# Altium PCB DS134-1.0-A色度传感器partA.PcbDoc
Units mil, origin at the board's own origin, x right, y up, seen from the top; angles counter-clockwise.
Board outline 1653.54 x 3661.42 mil, 2 copper layers (Top Layer, Bottom Layer), stack 62.249 mil thick; 32 components, 39 nets, 160 pads, 79 vias.
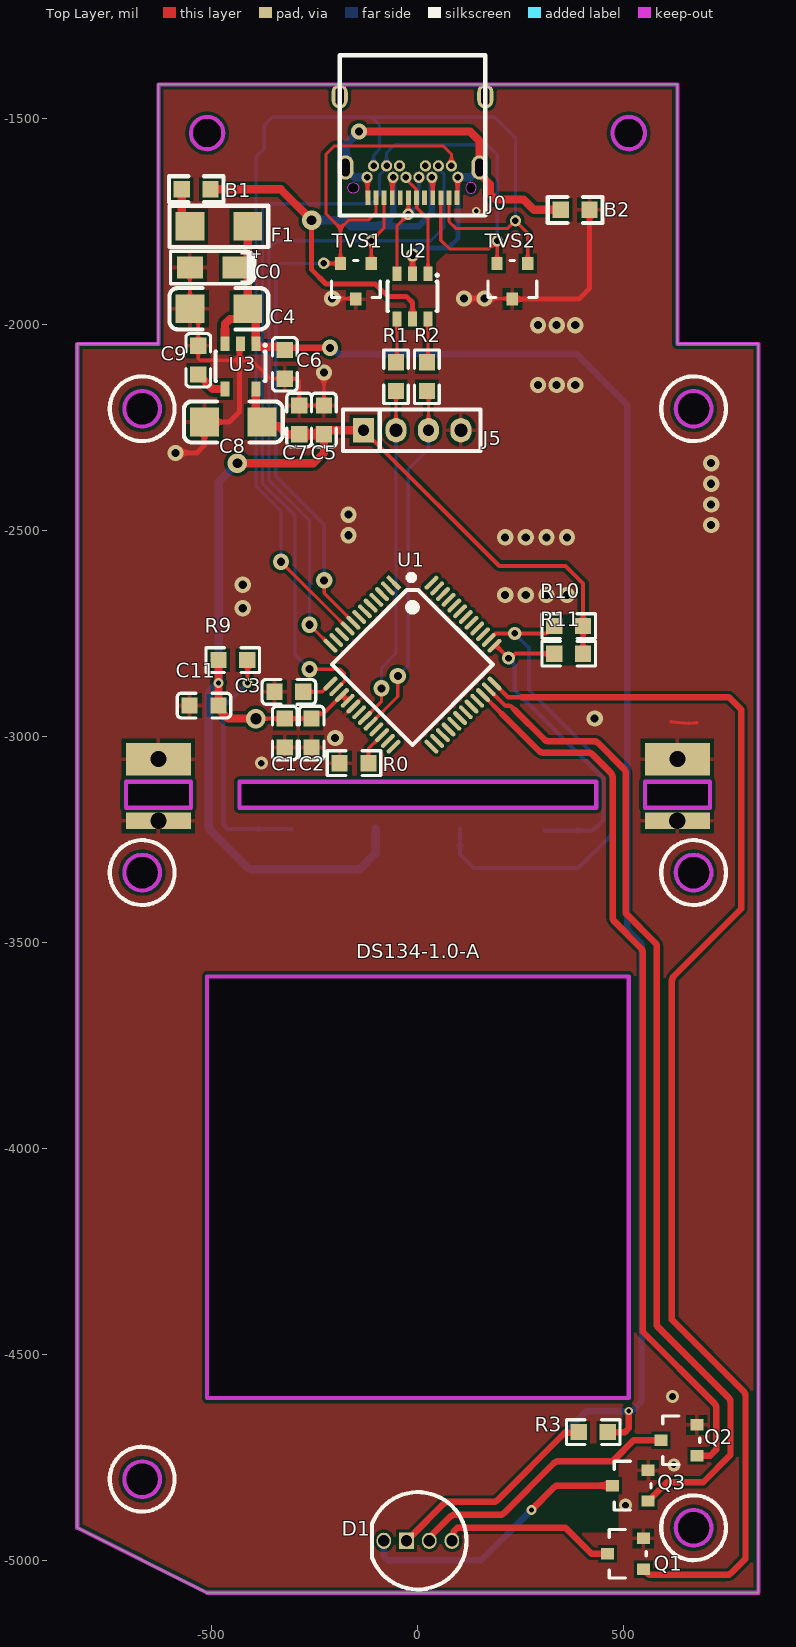
[diagram p0: Top Layer view]
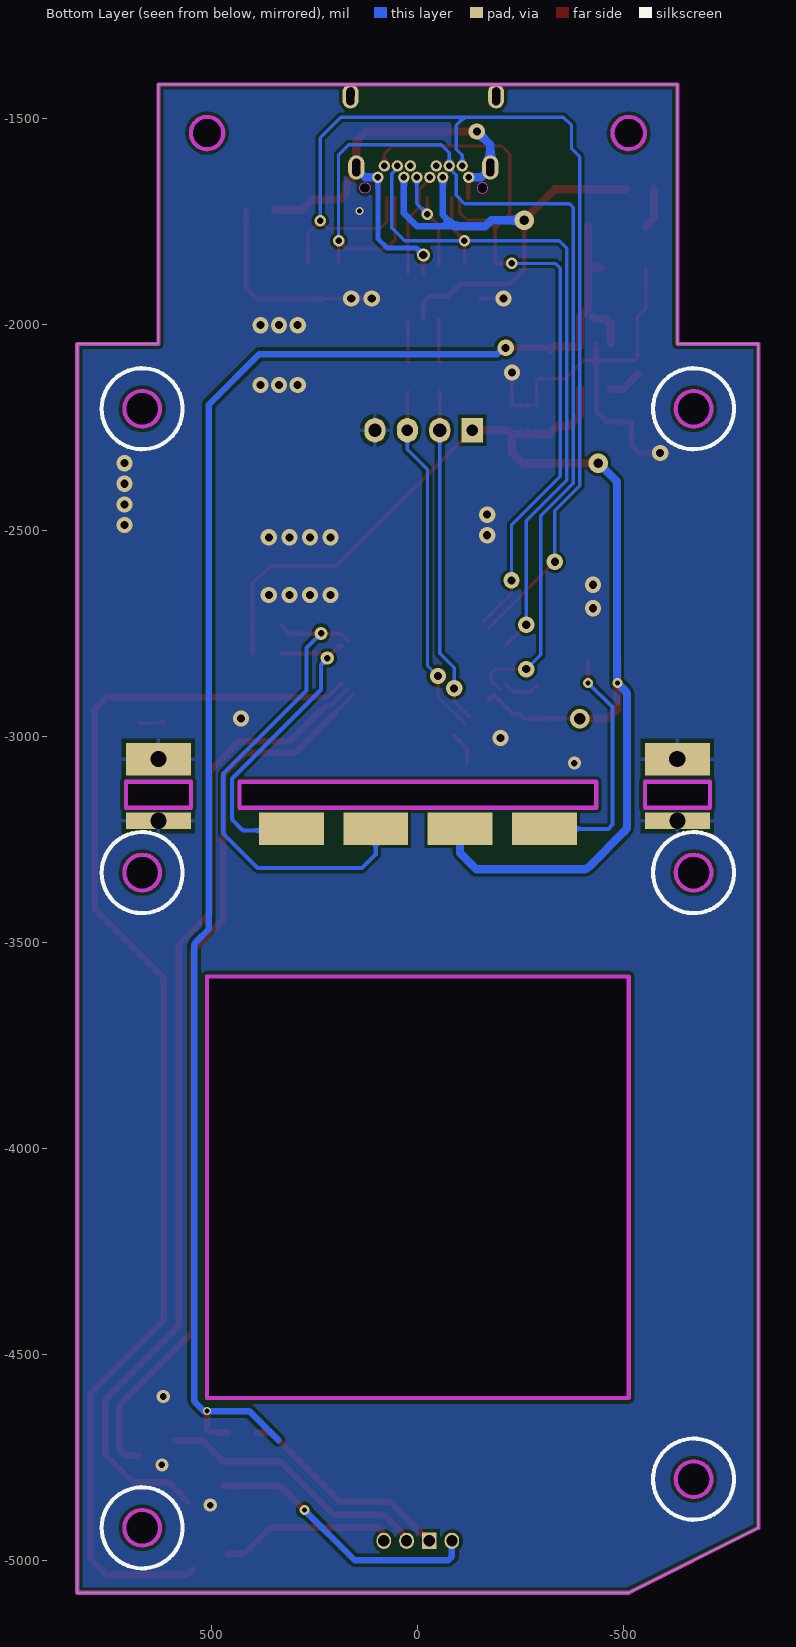
[diagram p1: Bottom Layer view, seen from below]
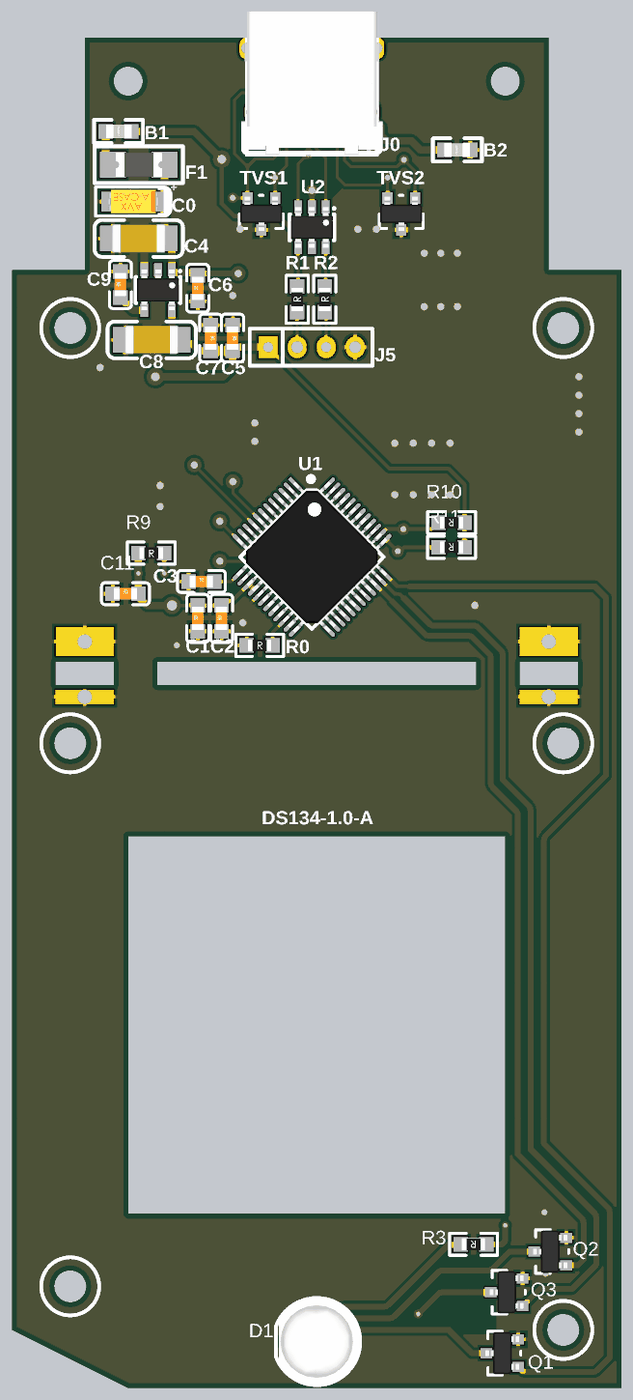
[diagram p2: 3D render of the assembled board from above, using the file's embedded part models]

## Layer stack, top to bottom
Top Solder: solder mask 0.4, Solder Resist, Dk 3.5
Top Layer: signal copper 1.4
Dielectric 1: dielectric 59.4488, FR-4, Dk 4.8
Bottom Layer: signal copper 1.4
Bottom Solder: solder mask 0.4, Solder Resist, Dk 3.5

## Board outline
-826.77,-4921.26 -511.81,-5078.74 826.77,-5078.74 826.77,-2047.24 629.92,-2047.24 629.92,-1417.32 -629.92,-1417.32 -629.92,-2047.24 -826.77,-2047.24
cut-out: 472.44,-1535.43 ccw(c511.81,-1535.43) 511.81,-1574.8 ccw(c511.81,-1535.43) 551.18,-1535.43 ccw(c511.81,-1535.43) 511.81,-1496.06 ccw(c511.81,-1535.43)
cut-out: -511.81,-1574.8 ccw(c-511.81,-1535.43) -472.44,-1535.43 ccw(c-511.81,-1535.43) -511.81,-1496.06 ccw(c-511.81,-1535.43) -551.18,-1535.43 ccw(c-511.81,-1535.43)
cut-out: -712.6,-4803.15 ccw(c-669.29,-4803.15) -669.29,-4846.46 ccw(c-669.29,-4803.15) -625.98,-4803.15 ccw(c-669.29,-4803.15) -669.29,-4759.84 ccw(c-669.29,-4803.15)
cut-out: 625.98,-4921.26 ccw(c669.29,-4921.26) 669.29,-4964.57 ccw(c669.29,-4921.26) 712.6,-4921.26 ccw(c669.29,-4921.26) 669.29,-4877.95 ccw(c669.29,-4921.26)
cut-out: 625.98,-3330.71 ccw(c669.29,-3330.71) 669.29,-3374.02 ccw(c669.29,-3330.71) 712.6,-3330.71 ccw(c669.29,-3330.71) 669.29,-3287.4 ccw(c669.29,-3330.71)
cut-out: -712.6,-3330.71 ccw(c-669.29,-3330.71) -669.29,-3374.02 ccw(c-669.29,-3330.71) -625.98,-3330.71 ccw(c-669.29,-3330.71) -669.29,-3287.4 ccw(c-669.29,-3330.71)
cut-out: 712.6,-2204.72 ccw(c669.29,-2204.72) 669.29,-2161.42 ccw(c669.29,-2204.72) 625.98,-2204.72 ccw(c669.29,-2204.72) 669.29,-2248.03 ccw(c669.29,-2204.72)
cut-out: -712.6,-2204.72 cw(c-669.29,-2204.72) -669.29,-2161.42 cw(c-669.29,-2204.72) -625.98,-2204.72 cw(c-669.29,-2204.72) -669.29,-2248.03 cw(c-669.29,-2204.72)
cut-out: -433.07,-3173.23 -433.07,-3110.24 433.07,-3110.24 433.07,-3173.23
cut-out: 551.18,-3173.23 551.18,-3110.24 708.66,-3110.24 708.66,-3173.23
cut-out: -708.66,-3173.23 -551.18,-3173.23 -551.18,-3110.24 -708.66,-3110.24
cut-out: -511.81,-4606.3 -511.81,-3582.68 511.81,-3582.68 511.81,-4606.3

## Design rules (kind name [scope] priority, off if disabled: settings)
Clearance [All] p1: gap=8 ignorepadtopadclearanceinfootprint=TRUE except(0: Arc-Hole Track-Hole SMDPad-Hole THPad-Hole Via-Hole Fill-Hole Poly-Hole Region-Hole Text-Hole; 4.72: THPad-THPad; 5.91: Arc-SMDPad Arc-THPad Track-SMDPad Track-THPad SMDPad-SMDPad; 7.87: Arc-Arc Arc-Track Arc-Via Arc-Text Track-Track Track-Via Track-Text SMDPad-THPad SMDPad-Text; 10: SMDPad-Via THPad-Via THPad-Text Via-Via Via-Text Fill-Text Poly-Text Region-Text Text-Text)
MinimumSolderMaskSliver [All] p1: minsoldermaskwidth=7.87
PolygonConnect GND [All] p1: thpad.connectstyle=Relief thpad.reliefconductorwidth=10 thpad.reliefentries=4 thpad.polygonreliefangle="90 Angle" thpad.airgapwidth=10 smdpad.connectstyle=Relief smdpad.reliefconductorwidth=10 smdpad.reliefentries=4 smdpad.polygonreliefangle="90 Angle" smdpad.airgapwidth=10 via.connectstyle=Direct via.reliefconductorwidth=10 via.reliefentries=4 via.polygonreliefangle="90 Angle" via.airgapwidth=10
PolygonConnect VSS [InNet('VSS') vs InNet('VSS')] p2: thpad.connectstyle=Relief thpad.reliefconductorwidth=20 thpad.reliefentries=4 thpad.polygonreliefangle="90 Angle" thpad.airgapwidth=10 smdpad.connectstyle=Relief smdpad.reliefconductorwidth=20 smdpad.reliefentries=4 smdpad.polygonreliefangle="90 Angle" smdpad.airgapwidth=10 via.connectstyle=Direct via.reliefconductorwidth=20 via.reliefentries=4 via.polygonreliefangle="90 Angle" via.airgapwidth=10
RoutingVias [All] p1: holewidth=23.62 width=39.37 viastyle="Through Hole" minholewidth=15.75 minwidth=31.5 maxholewidth=39.37 maxwidth=78.74
SilkToSilkClearance [All] p1: silktosilkclearance=3.94
SilkToSolderMaskClearance [IsPad] p1: minsilkscreentomaskgap=1.97 clearancetoexposedcopper=TRUE
SolderMaskExpansion [All] p1: expansion=4 istentingtop=FALSE
Width [All] p1: maxlimit=39.37 minlimit=7.87 preferedwidth=7.87
27 further rules are at their usual default settings.

## Classes and differential pairs
net class R11_Nets: I2C1_SDA VCC_3V3_MCU
net class R10_Nets: I2C1_SCL VCC_3V3_MCU
net class R9_Nets: INT VCC_3V3_MCU
net class C11_Nets: GND VCC_3V3_MCU
net class R3_Nets: NetD1_2 VCC_5V
net class Q3_Nets: Dis1_red_EN GND NetD1_1
net class Q2_Nets: Dis2_green_EN GND NetD1_3
net class Q1_Nets: Dis3_blue_EN GND NetD1_4
net class D1_Nets: NetD1_1 NetD1_2 NetD1_3 NetD1_4
net class U1_Nets: ADC0 ADC1 DAC_OUT Dis1_red_EN Dis2_green_EN Dis3_blue_EN GND I2C1_SCL I2C1_SDA KEY_HOME NetU1_1 NetU1_2 NetU1_3 NetU1_4 NetU1_7 NetU1_11 NetU1_23 NetU1_24 NetU1_25 NetU1_26 NetU1_30 NetU1_32 NetU1_39 NetU1_40 NetU1_41 NetU1_42 NetU1_43 NetU1_44 NetU1_45 NetU1_46 NetU1_47 NetU1_48 P3.0/D-/RxD P3.1/D+/TxD P3.3 PWM SPI1/SPI2_CS SPI1_MISO SPI1_MOSI SPI1_SCK SPI2_MISO SPI2_MOSI SPI2_SCK UCAP USART2_RXD USART2_TXD VCC_3V3_MCU
net class R0_Nets: GND P3.3
net class C3_Nets: GND UCAP
net class C1_Nets: GND VCC_3V3_MCU
net class C2_Nets: GND VCC_3V3_MCU
net class TVS2_Nets: GND SPI1/SPI2_CS SPI1_SCK
net class J0_Nets: D+_I/O1 D-_I/O2 NetJ0_A5 NetJ0_A8 NetJ0_B5 NetJ0_B8 SPI1/SPI2_CS SPI1_MISO SPI1_MOSI SPI1_SCK VBUS VSS
net class F1_Nets: NetB1_2 VCC_5V
net class C7_Nets: GND VCC_3V3_MCU
net class C4_Nets: GND VCC_5V
net class B2_Nets: GND VSS
net class B1_Nets: NetB1_2 VBUS
net class U3_Nets: GND NetC9_1 VCC_3V3_MCU VCC_5V
net class R2_Nets: P3.1/D+/TxD USB_D+
net class R1_Nets: P3.0/D-/RxD USB_D-
net class J5_Nets: GND P3.0/D-/RxD P3.1/D+/TxD VCC_3V3_MCU
net class U2_Nets: D+_I/O1 D-_I/O2 USB_D+ USB_D- VBUS VSS
net class TVS1_Nets: GND SPI1_MISO SPI1_MOSI
net class C0_Nets: GND VCC_5V
net class C5_Nets: GND VCC_3V3_MCU
net class C9_Nets: GND NetC9_1
net class C8_Nets: GND VCC_3V3_MCU
net class C6_Nets: GND VCC_5V

## Components (designator, comment, footprint, x,y, rotation, side; value= is the part's Value field where it differs from the comment)
B1 "CBM160808U102" 0603Bead -538.13,-1671.87 r180 top
B2 "CBM160808U102" 0603Bead 381.87,-1721.87 r0 top
C0 "AVX_10uF/16V ±10％(C106)" AVX_3216-18(1206)_SMD -498.13,-1861.87 r180 top value=10uF
C1 "SMDCAP00013" 0603CAP -323.13,-2991.91 r90 top value=100nF
C2 "SMDCAP00012" 0603CAP -258.13,-2991.91 r90 top value=4.7uF
C3 "SMDCAP00015" 0603CAP -313.13,-2891.87 r0 top value=1uF
C4 "MLCC 10uF 50V ±20％ 1206" 1206CAP -483.13,-1961.87 r0 top value=10uF
C5 "SMDCAP00013" 0603CAP -228.13,-2231.83 r270 top value=100nF
C6 "SMDCAP00015" 0603CAP -323.13,-2096.83 r90 top value=1uF
C7 "SMDCAP00015" 0603CAP -288.13,-2231.83 r270 top value=1uF
C8 "MLCC 10uF 50V ±20％ 1206" 1206CAP -448.13,-2236.83 r0 top value=10uF
C9 "SMDCAP00010" 0603CAP -533.13,-2086.87 r90 top value=10nF
C11 "SMDCAP00015" 0603CAP -519.29,-2925.2 r0 top value=1uF
D1 "DIPRGB00001" LED_RGB_YANG5 0,-4952.76 r0 top value=RGB
F1 "SMD1206-050C-16V" 1206FUSE -483.13,-1761.87 r0 top value="16V /0.5A"
J0 "USB_Type_C_24P" USB_TYPE_C_24P_Receptacle -13.13,-1569.55 r180 top locked
J5 "DIP4单排直针  间距2mm 针长11mm 铜" H4 -131.87,-2256.87 r0 top value=4P
Q1 "SMDIC000037" SOT23 503.94,-4984.25 r90 top value=DTC114ECA
Q2 "SMDIC000037" SOT23 633.86,-4708.66 r90 top value=DTC114ECA
Q3 "SMDIC000037" SOT23 515.75,-4818.9 r90 top value=DTC114ECA
R0 "Chip 0R 1/16W ±1％ 0603" 0603RES -155,-3065 r0 top value=0R
R1 "Chip 22R 1/16W ±1％ 0603" 0603RES -53.13,-2126.87 r90 top value=22R
R2 "Chip 22R 1/16W ±1％ 0603" 0603RES 21.87,-2126.87 r90 top value=22R
R3 "SMDRES00015" 0603RES 425.63,-4688.98 r180 top value=100R
R9 "SMDRES00034" 0603RES -449.25,-2814.96 r0 top value=1K
R10 "SMDRES00034" 0603RES 366.14,-2732.28 r180 top value=1K
R11 "SMDRES00034" 0603RES 366.14,-2799.21 r180 top value=1K
TVS1 "MMBZ9V1A" SOT23 -150.53,-1895.18 r180 top
TVS2 "MMBZ9V1A" SOT23 229.28,-1895.18 r180 top
U1 "STC32G12K128_35I LQFP48" LQFP-48 -13.13,-2825.89 r315 top value=STC32G12K128
U2 "82400102" SOT23-6 -13.13,-1931.76 r180 top
U3 "ME6211C33M5G-N" SOT23-5 -430.73,-2101.72 r180 top

## Footprints (in the part's own frame and the unit in brackets; to place one, negate y for a bottom-side part, rotate by r counter-clockwise, add the part's x,y. Pads: shape width x height; smd on the part's side, far side on the other; paste and mask are expansions set on the pad)
0603Bead [mm]
  rect 1x1 smd: 1(-0.889,0) 2(0.889,0)
  silkscreen extent -1.69,-0.8 1.69,0.8, body extent -0.9,-0.48 0.85,0.48, height 0.95
0603CAP [mm]
  rect 1x1 smd: 1(-0.889,0) 2(0.89,0)
  silkscreen extent -1.65,-0.76 1.65,0.76, body extent -0.8,-0.4 0.8,0.4, height 0.3
0603RES [mm]
  rect 1x1 smd: 1(-0.889,0) 2(0.889,0)
  silkscreen extent -1.65,-0.76 1.65,0.76, body extent -0.8,-0.41 0.8,0.41, height 0.51
1206CAP [mil]
  rect 70x70 smd: 1(-70,0) 2(70,0)
  silkscreen extent -120,-50 120,50, body extent -73,-38 73,38, height 47
1206FUSE [mil]
  rect 70x70 smd: 1(-70,0) 2(70,0)
  silkscreen extent -120,-50 120,50, body extent -63,-33 63,33, height 57
AVX_3216-18(1206)_SMD [mm]
  rect 1.6x1.35 smd: 1(-1.41,0) 2(1.41,0)
  silkscreen extent -2.6,-1 2.6,1, body extent -1.7,-0.84 1.7,0.84, height 1.71
H4 [mm]
  rect 1.3x1.5 hole 0.7: 1(0,0)
  oval 1.3x1.5 hole 0.813: 2(2,0) 4(6,0)
  oval 1.3x1.5 hole 0.7: 3(4,0)
  silkscreen extent -1.27,-1.27 7.2,1.27
LED_RGB_YANG5 [mm]
  oval 0.9x1 hole 0.7 mask+0.05: 1(-2.1,0) 3(0.7,0) 4(2.1,0)
  rect 0.9x1 hole 0.7 mask+0.05: 2(-0.7,0)
  silkscreen extent -2.82,-3 3,3, body extent -2.6,-3 3,3, height 7.99
LQFP-48 [mm]
  rect 1.1x0.27 smd mask+0.08: 1(-4.4,2.75)
  oval 1.1x0.27 smd mask+0.08: 2(-4.4,2.25) 3(-4.4,1.75) 4(-4.4,1.25) 5(-4.4,0.75) 6(-4.4,0.25) 7(-4.4,-0.25) 8(-4.4,-0.75) 9(-4.4,-1.25) 10(-4.4,-1.75) 11(-4.4,-2.25) 12(-4.4,-2.75) 25(4.4,-2.75) 26(4.4,-2.25) 27(4.4,-1.75) 28(4.4,-1.25) 29(4.4,-0.75) 30(4.4,-0.25) 31(4.4,0.25) 32(4.4,0.75) 33(4.4,1.25) 34(4.4,1.75) 35(4.4,2.25) 36(4.4,2.75)
  oval 0.27x1.1 smd mask+0.08: 13(-2.75,-4.4) 14(-2.25,-4.4) 15(-1.75,-4.4) 16(-1.25,-4.4) 17(-0.75,-4.4) 18(-0.25,-4.4) 19(0.25,-4.4) 20(0.75,-4.4) 21(1.25,-4.4) 22(1.75,-4.4) 23(2.25,-4.4) 24(2.75,-4.4) 37(2.75,4.4) 38(2.25,4.4) 39(1.75,4.4) 40(1.25,4.4) 41(0.75,4.4) 42(0.25,4.4) 43(-0.25,4.4) 44(-0.75,4.4) 45(-1.25,4.4) 46(-1.75,4.4) 47(-2.25,4.4) 48(-2.75,4.4)
  silkscreen extent -3.95,-3.5 3.5,3.85, body extent -4.51,-4.5 4.5,4.5, height 1.54
SOT23 [mm]
  rect 0.7x0.8 smd: 1(-0.95,-1.1) 2(0.95,-1.1) 3(0,1.1)
  silkscreen extent -1.5,-1.27 1.5,1, body extent -1.46,-1.17 1.46,1.17, height 1
SOT23-5 [mm] "SOT-23/SC-74A; 5 Leads; Body 3.1 x 3 mm, inc. leads (LxW max)"
  rect 0.55x0.9 smd: 1(-0.95,-1.4) 2(0,-1.4) 3(0.95,-1.4) 4(0.95,1.4) 5(-0.95,1.4)
  silkscreen extent -1.59,-1.36 1.55,0.9, body extent -1.45,-1.4 1.45,1.4, height 1.45
SOT23-6 [mm] "SOT-23/SC-74A; 5 Leads; Body 3.1 x 3 mm, inc. leads (LxW max)"
  rect 0.55x0.9 smd: 1(-0.95,-1.4) 2(0,-1.4) 3(0.95,-1.4) 4(0.95,1.4) 5(0,1.4) 6(-0.95,1.4)
  silkscreen extent -1.59,-1.36 1.55,0.9, body extent -1.45,-1.4 1.45,1.4, height 1.45
USB_TYPE_C_24P_Receptacle [mm]
  oval 1x1.5 hole 0.5 slot 1.1 at 90.5 deg: 0(-4.49,-3.13) 0(-4.13,1.26) 0(4.13,1.26) 0(4.49,-3.13)
  rect 0.3x0.9 smd mask+0.1: A1(-2.75,3.13) A2(-2.25,3.13) A3(-1.75,3.13) A4(-1.25,3.13) A5(-0.75,3.13) A6(-0.25,3.13) A7(0.25,3.13) A8(0.75,3.13) A9(1.25,3.13) A10(1.75,3.13) A11(2.25,3.13) A12(2.75,3.13)
  round 0.7 hole 0.4: B1(2.8,1.86) B2(2.4,1.16) B3(1.6,1.16) B4(1.2,1.86) B5(0.8,1.16) B6(0.4,1.86) B7(-0.4,1.86) B8(-0.8,1.16) B9(-1.2,1.86) B10(-1.6,1.16) B11(-2.4,1.16) B12(-2.8,1.86)
  Keep-Out Layer board cut-out: 3.98,2.51 3.955,2.384 3.883,2.277 3.776,2.205 3.65,2.18 3.65,2.18 3.524,2.205 3.417,2.277 3.345,2.384 3.32,2.51 3.32,2.51 3.345,2.636 3.417,2.743 3.524,2.815 3.65,2.84 3.65,2.84 3.776,2.815 3.883,2.743 3.955,2.636 3.98,2.51
  Keep-Out Layer board cut-out: -3.93,2.51 -3.905,2.384 -3.833,2.277 -3.726,2.205 -3.6,2.18 -3.6,2.18 -3.474,2.205 -3.367,2.277 -3.295,2.384 -3.27,2.51 -3.27,2.51 -3.295,2.636 -3.367,2.743 -3.474,2.815 -3.6,2.84 -3.6,2.84 -3.726,2.815 -3.833,2.743 -3.905,2.636 -3.93,2.51
  silkscreen extent -4.48,-5.66 4.48,4.21, body extent -4.87,-5.66 4.88,4.21, height 3.36

## Part data
B1 B2: library part "Chip Ferrite Bead 0606", "贴片磁珠"
C0: "钽电容"
C1 C5: library part "MLCC 100nF 50V ±10％ 0603", "贴片电容"
C2: library part "MLCC 4.7uF 50V ±10％ 0603", "贴片电容"
C3 C6 C7 C11: library part "MLCC 1uF 50V ±10％ 0603", "贴片电容"
C4 C8: "贴片电容"
C9: library part "MLCC 10nF 50V ±10％ 0603", "贴片电容"
D1: library part "Φ5 RGB 透明 共阳 DIP4", "RGB插件LED"
F1: "贴片自恢复保险丝 16V /0.5A"
J5: "单排直针"
Q1 Q2 Q3: library part "DTC114ECA SOT-23 长电", "数字晶体管"
R0 R1 R2: "贴片电阻"
R3: library part "Chip 100R 1/16W ±1％ 0603", "贴片电阻"
R9 R10 R11: library part "Chip 1K 1/16W ±1％ 0603", "贴片电阻"
TVS1 TVS2: library part TVS, "瞬态抑制二极管"
U1: "单片机芯片"
U2: "瞬态抑制二极管(TVS)"
U3: "稳压芯片"

## Free pads (board coordinates)
  rect 157.48x39.37 hole 39.37: 0(-630,-3205) 0(629.84,-3205)
  rect 157.48x78.74 hole 39.37: 0(-629.84,-3055.12) 0(630,-3055.12)
  rect 157.48x78.74 smd far side: 2(-307.09,-3224.41) 2(-102.36,-3224.41) 2(102.36,-3224.41) 2(307.09,-3224.41)

## Via types
v1: diameter 39.37, hole 19.68, Top Layer to Bottom Layer, tented both sides, 52 vias
v2: diameter 27.56, hole 15.75, Top Layer to Bottom Layer, tented both sides, 10 vias
v3: diameter 32, hole 16, Top Layer to Bottom Layer, tented both sides, 6 vias
v4: diameter 24, hole 12, Top Layer to Bottom Layer, tented both sides, 3 vias
v5: diameter 47.24, hole 23.62, Top Layer to Bottom Layer, tented both sides, 3 vias
v6: diameter 20, hole 12, Top Layer to Bottom Layer, tented both sides, 2 vias
v7: diameter 31.5, hole 19.68, Top Layer to Bottom Layer, tented both sides, 2 vias
v8: diameter 47.24, hole 27.56, Top Layer to Bottom Layer, tented both sides, 1 vias

## Nets (pads, with @x,y where several pads share a name; then routed paths per layer and width w, separated by ;. In a path a pad name is that pad's centre, name@x,y a point inside that pad or via, vN(x,y) a via of type N, cw(c..) or ccw(c..) an arc to the next point about the centre after c; other vN are vias at no path point)
ADC0: U1.5
ADC1: U1.6
D+_I/O1: J0.A6 J0.B6 U2.1 | length 255.9
  Top Layer w7.87: J0.B6 -28.87,-1647.47 -3.28,-1673.06 J0.A6 -2.64,-1693.42 -2.64,-1716.39 24.28,-1743.3 U2.1
D-_I/O2: J0.A7 J0.B7 U2.3 | length 275.6
  Top Layer w7.87: -50.53,-1856.87 -50.53,-1759.8 v2(-22.97,-1732.25) J0.A7
  Bottom Layer w7.87: v2(-22.97,-1732.25) 2.62,-1706.66 J0.B7
  other v2: -22.97,-1732.25
DAC_OUT: U1.10
Dis1_red_EN: Q3.1 U1.35 | length 2423.7
  Top Layer w10: U1.35 209.1,-2922.84 ccw(c216.17,-2915.77) 216.17,-2925.77 220.84,-2925.77 cw(c220.84,-2935.77) 227.89,-2928.68 236.22,-2937.01
  Top Layer w15.75: 236.22,-2937.01 306.46,-3007.24 ccw(c317.55,-2996.06) 317.49,-3011.81 426.55,-3011.81 cw(c426.55,-3027.56) 437.64,-3016.38 500.41,-3079.15 cw(c489.25,-3090.26) 505,-3090.26 505,-3430 575.77,-3500.77 cw(c564.63,-3511.9) 580.38,-3511.9 580.38,-4431.09 754.25,-4604.96 cw(c743.11,-4616.1) 758.86,-4616.1 758.86,-4744.09 692.42,-4810.53 604.82,-4810.53 566.93,-4848.43 566.93,-4850.39 561.02,-4856.3 Q3.1
Dis2_green_EN: Q2.1 U1.34 | length 2186.7
  Top Layer w10: U1.34 204.72,-2946.3
  Top Layer w15.75: 204.72,-2946.3 293.21,-3034.79 ccw(c304.31,-3023.62) 304.26,-3039.37 412.85,-3039.37 cw(c412.85,-3055.12) 423.98,-3043.98 467.83,-3087.83 cw(c456.69,-3098.96) 472.44,-3098.96 472.44,-3438.36 ccw(c488.19,-3438.36) 477.03,-3449.47 ; 477.05,-3449.49 541.32,-3513.76 cw(c530.18,-3524.9) 545.93,-3524.9 545.93,-4445.36 719.8,-4619.23 cw(c708.66,-4630.36) 724.41,-4630.36 724.41,-4731.18 709.53,-4746.06 Q2.1
Dis3_blue_EN: Q1.1 U1.36 | length 3097.2
  Top Layer w10: U1.36 219.1,-2905 252.05,-2905
  Top Layer w15.75: 252.05,-2905 755,-2905 785,-2935 785,-3418.43 621.41,-3582.02 ccw(c632.55,-3593.16) 616.8,-3593.16 616.8,-4416.01 790.66,-4589.88 cw(c779.53,-4601.01) 795.28,-4601.01 795.28,-4996.06 760.52,-5030.82 cw(c749.38,-5019.69) 749.38,-5035.43 567.55,-5035.43 cw(c567.55,-5019.69) 556.45,-5030.86 556.41,-5030.82 Q1.1
GND: B2.2 C0.2 C1.1 C2.1 C3.1 C4.1 C5.1 C6.1 C7.1 C8.1 C9.2 C11.1 J5.4 pad.0 Q1.2 Q2.2 Q3.2 R0.1 TVS1.3 TVS2.3 U1.17 U3.2 | length 1717.5
  Top Layer w7.87: C0.2 -553.64,-1961.36 C4.1 -533.13,-1981.87 -533.13,-2082.26 -528.51,-2086.87 -433.13,-2086.87 -403.13,-2086.87 -358.17,-2131.83 C6.1 -292.74,-2131.83 -288.13,-2136.45 C7.1 C5.1 v1(-228.13,-2116.87) ; v1(-208.13,-1936.87) -152.14,-1936.87 TVS1.3 TVS1.3@-150.53,-1940.46 ; v1(111.87,-1936.87) v1(161.87,-1936.87) 227.66,-1936.87 TVS2.3 ; 614.17,-2964.57 656.82,-2968.44 ccw(c657.51,-2960.6) 658.17,-2968.45 676.87,-2966.87
  Top Layer w11.81: v1(-588.13,-2311.87) -536.28,-2311.87 -518.13,-2293.72 C8.1 ; C8.1@-513.13,-2236.87 -458.13,-2236.87 -433.13,-2211.87 -433.13,-2086.87 U3.2@-433.13,-2046.6 ; TVS2.3 390.26,-1938.49 416.87,-1911.87 B2.2 B2.2@416.2,-1721.2
  other v1: -200.79,-3003.94 429.13,-2956.69 -425.2,-2688.98 211.87,-2656.87 261.87,-2656.87 311.87,-2656.87 361.87,-2656.87 -425.2,-2631.87 211.87,-2516.87 261.87,-2516.87 311.87,-2516.87 361.87,-2516.87 -168.13,-2511.87 711.87,-2486.87 -168.13,-2461.87 711.87,-2436.87 711.87,-2386.87 711.87,-2386.87 711.87,-2336.87 711.87,-2336.87 -588.13,-2311.87 291.87,-2146.87 291.87,-2146.87 336.87,-2146.87 336.87,-2146.87 381.87,-2146.87 381.87,-2146.87 -228.13,-2116.87 291.87,-2001.87 291.87,-2001.87 336.87,-2001.87 336.87,-2001.87 381.87,-2001.87 381.87,-2001.87 -208.13,-1936.87 111.87,-1936.87 161.87,-1936.87
  other v3: 503.94,-4866.14 621.39,-4768.44 618.11,-4602.36 -380,-3065
  other v6: 141.73,-1724.41
I2C1_SCL: pad.2@102.36,-3224.41 R10.2 U1.38 | length 1236.4
  Top Layer w10: U1.38 172.17,-2766.04 188.21,-2750 309.28,-2750 ccw(c309.28,-2740) 316.35,-2747.07 R10.2
  Bottom Layer w10: pad.2@102.36,-3224.41 102.36,-3286.79 135.45,-3319.87 384.65,-3319.87 ccw(c384.65,-3309.87) 391.7,-3316.96 469.51,-3239.15 ccw(c462.44,-3232.08) 472.44,-3232.08 472.44,-3094.69 ccw(c462.44,-3094.69) 469.51,-3087.62 272.91,-2891.02 cw(c280,-2883.97) 270,-2883.97 270,-2785 v3(235,-2750)
I2C1_SDA: pad.2@307.09,-3224.41 R11.2 U1.37 | length 805.6
  Top Layer w10: U1.37 187.73,-2778.14 188.14,-2778.14 v3(220,-2810) 225.95,-2810 236.74,-2799.21 R11.2
  Bottom Layer w10: v3(220,-2810) 220,-2811.86 235,-2826.86 235,-2886.89 450.94,-3102.83 450.94,-3133.86 450.94,-3198.46 cw(c440.94,-3198.46) 448.05,-3205.49 428.11,-3225.43 cw(c421.05,-3218.35) 421.05,-3228.35 pad.2@307.09,-3228.35
INT: pad.2@-307.09,-3224.41 R9.2 | length 593.6
  Top Layer w10: R9.2 -413.39,-2815.83 v4(-413.39,-2870.08)
  Bottom Layer w10: v4(-413.39,-2870.08) -472.44,-2929.13 -472.44,-3214.2 -462.23,-3224.41 pad.2@-307.09,-3224.41
KEY_HOME: U1.21
NetB1_2: B1.2 F1.1 | length 98.3
  Top Layer w20: B1.2 -573.13,-1741.87 F1.1
NetC9_1: C9.1 U3.4 | length 79.5
  Top Layer w20: C9.1 -498.17,-2156.83 U3.4
NetD1_1: D1.1 Q3.3 | length 676.6
  Top Layer w15.75: D1.1 D1.1@-78.91,-4956.52 ; v4(275.59,-4877.95) 330.03,-4823.51 cw(c341.17,-4834.65) 341.17,-4818.9 Q3.3
  Bottom Layer w15.75: D1.1 -82.68,-4990.77 -73.45,-5000 153.54,-5000 v4(275.59,-4877.95)
NetD1_2: D1.2 R3.2 | length 527.2
  Top Layer w15.75: D1.2 -27.56,-4950.79 -17.72,-4940.94 -15.75,-4940.94 62.32,-4862.88 cw(c73.45,-4874.02) 73.45,-4858.27 182.45,-4858.27 ccw(c182.45,-4842.52) 193.59,-4853.66 356.55,-4690.7 388.91,-4690.7 R3.2
NetD1_3: D1.3 Q2.3 | length 666
  Top Layer w15.75: D1.3 27.56,-4945.46 37.4,-4935.62 37.4,-4935.04 78.06,-4894.38 cw(c89.2,-4905.51) 89.2,-4889.76 198.2,-4889.76 ccw(c198.2,-4874.02) 209.34,-4885.15 330.03,-4764.45 cw(c341.17,-4775.59) 341.17,-4759.84 465.92,-4759.84 ccw(c465.92,-4744.09) 477.05,-4755.23 523.62,-4708.66 Q2.3
NetD1_4: D1.4 Q1.3 | length 427.9
  Top Layer w15.75: D1.4 86.44,-4948.99 86.44,-4930.48 95.67,-4921.26 358.27,-4921.26 421.26,-4984.25 Q1.3
P3.0/D-/RxD: J5.2 R1.1 U1.19 | length 824.8
  Top Layer w7.87: U1.19 -88.13,-2914.81 v1(-88.13,-2883.34) ; J5.2 R1.1
  Bottom Layer w7.87: v1(-88.13,-2883.34) -88.13,-2833.13 -53.13,-2798.13 J5.2
P3.1/D+/TxD: J5.3 R2.1 U1.20 | length 867.1
  Top Layer w7.87: U1.20 -48.75,-2903.27 v1(-48.75,-2853.56) ; R2.1 25.61,-2165.61 J5.3
  Bottom Layer w7.87: v1(-48.75,-2853.56) -23.13,-2827.94 -23.13,-2351.87 25.61,-2303.13 J5.3
P3.3: R0.2 U1.22 | length 81.6
  Top Layer w7.87: R0.2 -120,-3030.2 U1.22
PWM: U1.33
SPI1/SPI2_CS: J0.A3 J0.B3 TVS2.2 U1.14 | length 2513
  Top Layer w7.87: v1(-263.13,-2836.87) -188.13,-2836.87 -178.13,-2846.87 -178.13,-2865.61 U1.14 ; J0.A3 55.77,-1795.77 76.87,-1816.87 172.43,-1816.87 v2(192.43,-1796.87) 192.43,-1851.32 TVS2.2
  Bottom Layer w7.87: v1(-263.13,-2836.87) -298.13,-2801.87 -298.13,-2464.6 -377.38,-2385.35 -377.38,-1716.13 -368.13,-1706.87 -113.13,-1706.87 -93.13,-1686.87 -93.13,-1637.55 J0.B3@-76.12,-1620.55 ; J0.B3 -76.12,-1583.37 -56.83,-1564.08 168.17,-1564.08 192.42,-1588.33 v2(192.43,-1796.87)
  other v2: 192.42,-1796.87
SPI1_MISO: J0.A11 J0.B11 TVS1.2 U1.8 | length 1868
  Top Layer w7.87: v2(-228.13,-1851.87) TVS1.2 -187.93,-1767.07 ; v1(-227.54,-2621.28) -227.54,-2652.06 U1.8@-155.91,-2723.69 ; J0.A11 -101.71,-1728.96 -119.18,-1746.43 -167.29,-1746.43 -187.93,-1767.07 ; J0.B11 81.36,-1586.36 61.87,-1566.87 -203.13,-1566.87 -223.13,-1586.87 -223.13,-1731.87 -187.93,-1767.07
  Bottom Layer w7.87: v2(-228.13,-1851.87) -333.13,-1851.87 -345.29,-1864.04 -345.29,-2368.53 -227.54,-2486.28 v1(-227.54,-2621.28)
  other v2: -228.13,-1851.87
SPI1_MOSI: J0.A10 J0.B10 TVS1.1 U1.12 | length 1799.8
  Top Layer w7.87: v1(-263.13,-2729) U1.12 ; TVS1.1 v2(-113.13,-1796.87) -82.02,-1765.77 J0.A10
  Bottom Layer w7.87: v1(-263.13,-2729) -263.13,-2476.87 -361.63,-2378.37 -361.63,-1815.38 -343.13,-1796.87 v2(-113.13,-1796.87) 31.87,-1796.87 63.17,-1765.57 63.17,-1633.85 49.87,-1620.55 J0.B10
  other v2: -113.13,-1796.87
SPI1_SCK: J0.A2 J0.B2 TVS2.1 U1.9 | length 2644.3
  Top Layer w7.87: v1(-332.43,-2576.18) U1.9 ; J0.A2 75.46,-1750.46 91.87,-1766.87 218.54,-1766.87 v2(236.87,-1748.54) 266.68,-1778.34 TVS2.1
  Bottom Layer w7.87: v1(-332.43,-2576.18) -332.43,-2452.57 -393.13,-2391.87 -393.13,-1593.41 -373.13,-1573.41 -373.13,-1516.87 -353.13,-1496.87 -113.13,-1496.87 ; J0.B2 -107.61,-1589.51 -93.13,-1575.02 -93.13,-1516.87 -113.13,-1496.87 ; v2(236.87,-1748.54) 236.87,-1546.87 186.87,-1496.87 -113.13,-1496.87
  other v2: 236.87,-1748.54
SPI2_MISO: U1.29
SPI2_MOSI: U1.18
SPI2_SCK: U1.31
UCAP: C3.2 U1.13 | length 90.5
  Top Layer w7.87: C3.2@-288.13,-2876.87 -273.13,-2891.87 -232.22,-2891.87 U1.13
USART2_RXD: U1.27
USART2_TXD: U1.28
USB_D+: R2.2 U2.6 | length 106
  Top Layer w7.87: R2.2 24.28,-2089.47 U2.6
USB_D-: R1.2 U2.4 | length 106.1
  Top Layer w7.87: R1.2 -50.53,-2089.27 U2.4
VBUS: B1.1 J0.A4 J0.A9 J0.B4 J0.B9 U2.5 | length 1343.8
  Top Layer w10: J0.A9 J0.A9@-61.43,-1691.87 ; J0.B4@-61.43,-1643.84 J0.B4 ; J0.B9 J0.B9@35.18,-1643.84
  Top Layer w11.81: v5(-258.13,-1746.87) -258.13,-1866.87 -223.13,-1901.87 -103.13,-1901.87 -73.13,-1931.87 -28.13,-1931.87 -13.13,-1946.87 U2.5 ; J0.A9 J0.B4@-62.34,-1644.75 ; J0.A4 J0.B9@36.09,-1644.75
  Top Layer w20: B1.1 -333.13,-1671.87 v5(-258.13,-1746.87)
  Bottom Layer w15.75: J0.B4 -60.37,-1734.12 -88.13,-1761.87 1.87,-1761.87 34.12,-1729.63 J0.B9
  Bottom Layer w20: v5(-258.13,-1746.87) -178.13,-1746.87 -163.13,-1761.87 -88.13,-1761.87
  other v5: -258.13,-1746.87
VCC_3V3_MCU: C1.2 C2.2 C5.2 C7.2 C8.2 C11.2 J5.1 pad.2@-102.36,-3224.41 R9.1 R10.1 R11.1 U1.15 U1.16 U3.5 | length 3380.4
  Top Layer w9.45: v8(-393.13,-2956.87) C1.2 C2.2
  Top Layer w10: C2.2 -246.12,-2944.87 -229.54,-2944.87 U1.15 U1.16 ; J5.1 -131.87,-2260.81 -111.28,-2281.4 -107.34,-2281.4 197.44,-2586.18 358.27,-2586.18 401.14,-2629.06 R10.1 R11.1
  Top Layer w11.81: C5.2 C5.2@-218.13,-2256.87
  Top Layer w20: R9.1 v4(-484.25,-2870.08) -484.25,-2933.07 -460.45,-2956.87 v8(-393.13,-2956.87) ; v5(-438.13,-2336.87) -253.13,-2336.87 -228.13,-2311.87 C5.2 C7.2 -318.13,-2266.87 -338.13,-2246.87 -368.09,-2246.87 C8.2 -393.32,-2221.64 U3.5 ; C5.2@-218.13,-2256.87 J5.1
  Bottom Layer w20: v4(-484.25,-2870.08) -502.02,-2887.84 ccw(c-487.87,-2901.98) -507.87,-2901.98 -507.87,-3216.21 ccw(c-487.87,-3216.13) -502.08,-3230.21 -415.24,-3317.04 ccw(c-401.16,-3302.83) -401.25,-3322.83 -141.73,-3322.83 -102.36,-3283.46 pad.2@-102.36,-3224.41 ; v4@-483.13,-2870.08 -483.13,-2381.87 v5(-438.13,-2336.87)
VCC_5V: C0.1 C4.2 C6.2 F1.2 R3.1 U3.1 U3.3 | length 4157.4
  Top Layer w15.75: C6.2@-318.2,-2056.87 v1(-213.13,-2056.87) ; R3.1 502.59,-4688.98 511.81,-4679.75 v6(511.81,-4637.8)
  Top Layer w20: U3.3 -468.13,-1998.59 -456.41,-1986.87 -429.29,-1986.87 C4.2@-424.29,-1981.87 ; C0.1 C0.1@-413.13,-1861.87 ; F1.2 C0.1@-413.13,-1861.87 ; U3.1 -393.32,-1981.68 C4.2 C0.1@-413.13,-1861.87 ; U3.1@-392.5,-2054.31 -330.61,-2054.31 C6.2 C6.2@-318.2,-2056.87
  Bottom Layer w15.75: v1(-213.13,-2056.87) -207.89,-2056.87 -192.88,-2071.87 385,-2071.87 507.87,-2194.75 507.87,-3468.5 538.69,-3499.32 cw(c527.56,-3510.46) 543.31,-3510.46 543.31,-4607.65 cw(c527.56,-4607.65) 538.69,-4618.79 519.69,-4637.8 v6(511.81,-4637.8) 409.45,-4637.8 338.58,-4708.66
  other v1: -213.13,-2056.87
VSS: B2.1 J0.0@149.47,-1619.16 J0.0@-175.73,-1619.16 J0.A1 J0.A12 J0.B1 J0.B12 U2.2 | length 1279.4
  Top Layer w10: J0.B1 -122.3,-1643.84 -122.3,-1691.87 J0.A12 ; J0.A1 96.05,-1691.87 96.05,-1643.84 J0.B12
  Top Layer w11.81: U2.2 v7(-13.13,-1831.64)
  Top Layer w20: v1@-148.34,-1531.87 126.87,-1531.87 149.47,-1554.47 149.47,-1619.16 149.47,-1634.24 174.45,-1659.22 174.45,-1682.73 188.59,-1696.87 256.87,-1696.87 281.87,-1721.87 B2.1
  Bottom Layer w11.81: v7(-13.13,-1831.64) 3.92,-1814.59 74.16,-1814.59 97.11,-1791.64 J0.B12
  Bottom Layer w20: J0.0@-175.73,-1619.16 -175.73,-1564.47 v1(-143.13,-1531.87) ; J0.0@-175.45,-1621.33 -154,-1642.78 J0.B1 ; J0.B12 127.74,-1642.78 J0.0@149.2,-1621.33
  other v1: -143.13,-1531.87
  other v7: -13.13,-1831.64
pads on no net: J0.0@163.65,-1446.32 J0.0@-189.9,-1446.32 J0.A5 J0.A8 J0.B5 J0.B8 U1.1 U1.2 U1.3 U1.4 U1.7 U1.11 U1.23 U1.24 U1.25 U1.26 U1.30 U1.32 U1.39 U1.40 U1.41 U1.42 U1.43 U1.44 U1.45 U1.46 U1.47 U1.48

## Polygon pours and split planes (outlines as drawn)
GND on Top Layer "GND_L01_P003" (solid, remove dead copper, pour order 3): -826.77,-4921.26 -826.77,-2047.24 -629.92,-2047.24 -629.92,-1417.32 629.92,-1417.32 629.92,-2047.24 826.77,-2047.24 826.77,-5078.74 -511.81,-5078.74
no net on Top Layer "NONET_L01_P000" (none, pour order 0): -708.66,-3173.23 -551.18,-3173.23 -551.18,-3110.24 -708.66,-3110.24
GND on Bottom Layer "GND_L02_P002" (solid, remove dead copper, pour order 2): -826.77,-4921.26 -826.77,-2047.24 -629.92,-2047.24 -629.92,-1417.32 629.92,-1417.32 629.92,-2047.24 826.77,-2047.24 826.77,-5078.74 -511.81,-5078.74
no net on Bottom Layer "NONET_L02_P001" (none, pour order 1): -708.66,-3173.23 -551.18,-3173.23 -551.18,-3110.24 -708.66,-3110.24

## Keep-outs
Keep-Out Layer:
  circle w10: c-669.29,-2204.72 r43.31
  circle w10: c669.29,-2204.72 r43.31
  circle w10: c-669.29,-3330.71 r43.31
  circle w10: c669.29,-3330.71 r43.31
  circle w10: c-669.29,-4803.15 r43.31
  circle w10: c669.29,-4921.26 r43.31
  circle w10: c-511.81,-1535.43 r39.37
  circle w10: c511.81,-1535.43 r39.37
  lines w10: -826.77,-4921.26 -826.77,-2047.24 -629.92,-2047.24 -629.92,-1417.32 629.92,-1417.32 629.92,-2047.24 826.77,-2047.24 826.77,-5078.74 -511.81,-5078.74 -826.77,-4921.26 ; -708.66,-3173.23 -708.66,-3110.24 -551.18,-3110.24 -551.18,-3173.23 -708.66,-3173.23 ; -511.81,-4606.3 -511.81,-3582.68 511.81,-3582.68 511.81,-4606.3 -511.81,-4606.3 ; -433.07,-3173.23 -433.07,-3110.24 433.07,-3110.24 433.07,-3173.23 -433.07,-3173.23 ; 551.18,-3173.23 551.18,-3110.24 708.66,-3110.24 708.66,-3173.23 551.18,-3173.23

## Other copper
Top Layer:
  pour cut-out: 350.39,-4708.66 358.27,-4716.54 503.94,-4716.54 488.19,-4732.28 488.19,-4933.07 249.18,-4933.07 216.19,-4900.07
  pour cut-out: 303.46,-2704.6 428.83,-2704.6 428.83,-2826.9 306.53,-2826.9
  pour cut-out: 23.12,-1725.12 23.12,-1722.41 25.03,-1720.5 43.73,-1720.5 43.73,-1800.76 68.36,-1825.39 45.1,-1848.65 45.1,-1848.92 36.32,-1848.92
  pour cut-out: -98.69,-1742.97 -95.98,-1742.97 -62.99,-1775.96 -62.99,-1923.65 -106.37,-1880.27 -224.86,-1880.27 -175.89,-1831.3 -175.89,-1772.06
  pour cut-out: -248.4,-2903.92 -247.76,-2903.27 -224.23,-2903.27 -224.23,-2904.51 -218.89,-2909.85 -218.89,-2915.66 -230.42,-2927.19 -287.81,-2927.19 -287.81,-2944.03 -293.44,-2944.03 -293.44,-2927.19 -312.81,-2927.19 -318.44,-2921.56 -307.77,-2921.56

## Silkscreen, mask and mechanical layers (free items; w line width, h text height)
Top Overlay:
  circle w10: c669.29,-4921.26 r78.74
  circle w10: c-669.29,-4803.15 r78.74
  circle w10: c669.29,-3330.71 r78.74
  circle w10: c-669.29,-3330.71 r78.74
  circle w10: c669.29,-2204.72 r78.74
  circle w10: c-669.29,-2204.72 r78.74
  text "DS134-1.0-A" at -149.61,-3550.47 h59.06
Bottom Overlay:
  circle w10: c669.29,-4921.26 r98.43
  circle w10: c-669.29,-4803.15 r98.43
  circle w10: c669.29,-3330.71 r98.43
  circle w10: c-669.29,-3330.71 r98.43
  circle w10: c669.29,-2204.72 r98.43
  circle w10: c-669.29,-2204.72 r98.43
Mechanical 1:
  circle w10: c511.81,-1535.43 r39.42
  circle w10: c-511.81,-1535.43 r39.56
  circle w10: c669.29,-4921.26 r43.31
  circle w10: c-669.29,-4803.15 r43.31
  circle w10: c669.29,-3330.71 r43.31
  circle w10: c-669.29,-3330.71 r43.31
  circle w10: c669.29,-2204.72 r43.31
  circle w10: c-669.29,-2204.72 r43.31
  lines w10: -826.77,-4921.26 -511.81,-5078.74 826.77,-5078.74 826.77,-2047.24 629.92,-2047.24 629.92,-1417.32 -629.92,-1417.32 -629.92,-2047.24 -826.77,-2047.24 -826.77,-2106.3 -826.77,-4921.26 ; -708.66,-3173.23 -551.18,-3173.23 -551.18,-3110.24 -708.66,-3110.24 -708.66,-3173.23 ; -511.81,-4606.3 511.81,-4606.3 511.81,-3582.68 -511.81,-3582.68 -511.81,-4606.3 ; -433.07,-3173.23 433.07,-3173.23 433.07,-3110.24 -433.07,-3110.24 -433.07,-3173.23 ; 551.18,-3173.23 551.18,-3110.24 708.66,-3110.24 708.66,-3173.23 551.18,-3173.23
Mechanical 15:
  circle w10: c-1.8,-2562.23 r23.62

## Text inside footprints (layer, text, board x,y; h text height)
C0: Top Overlay "+" at -378.13,-1811.87 h39.37 r180